# Altium PCB sensor.PcbDoc
Units mil, origin at the board's own origin, x right, y up, seen from the top; angles counter-clockwise.
Board outline 2500 x 2200 mil, 2 copper layers (Top Layer, Bottom Layer); 22 components, 20 nets, 80 pads, 0 vias.
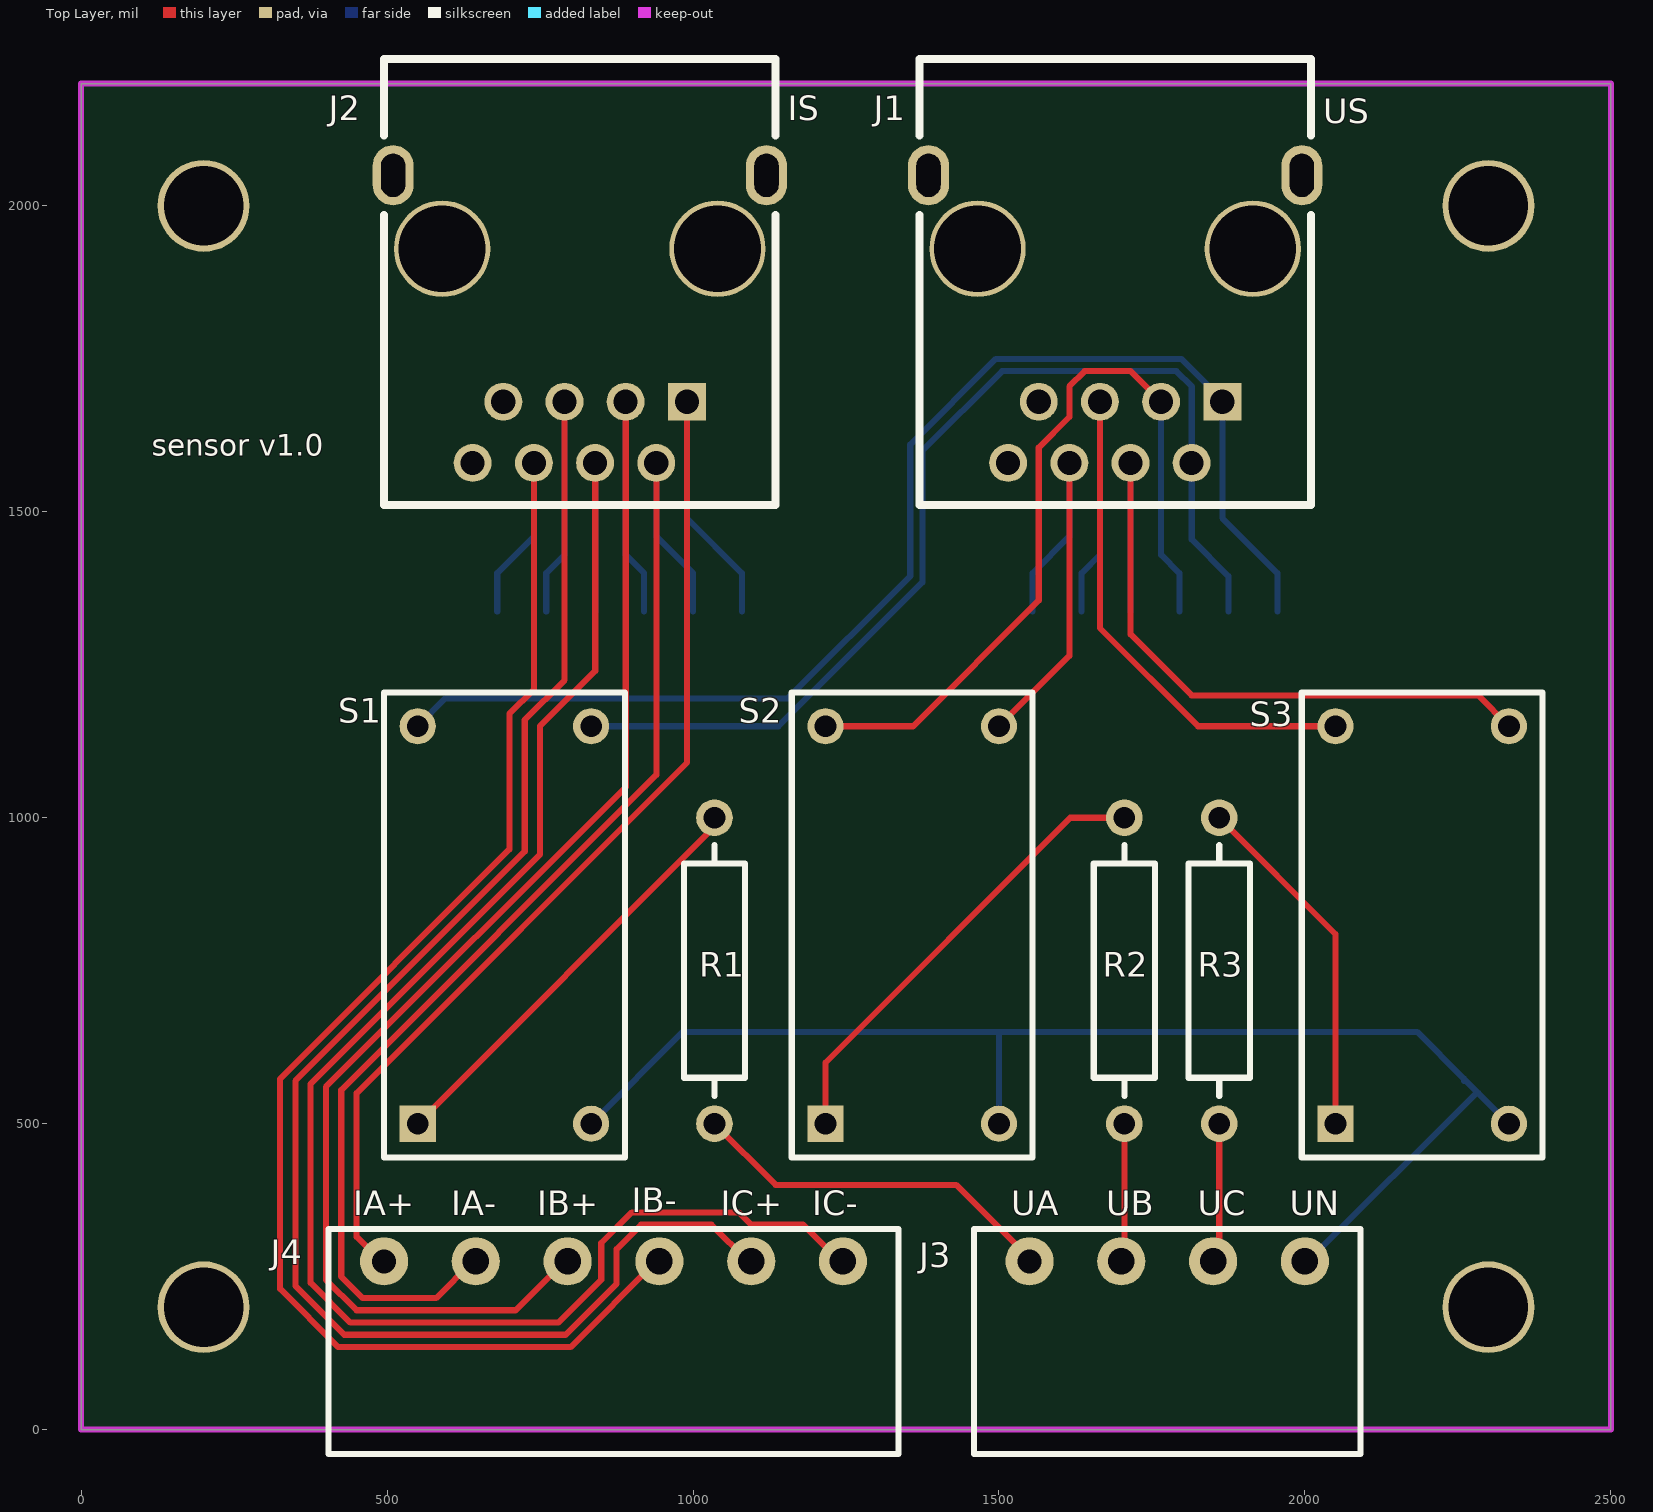
[diagram p0: Top Layer view]
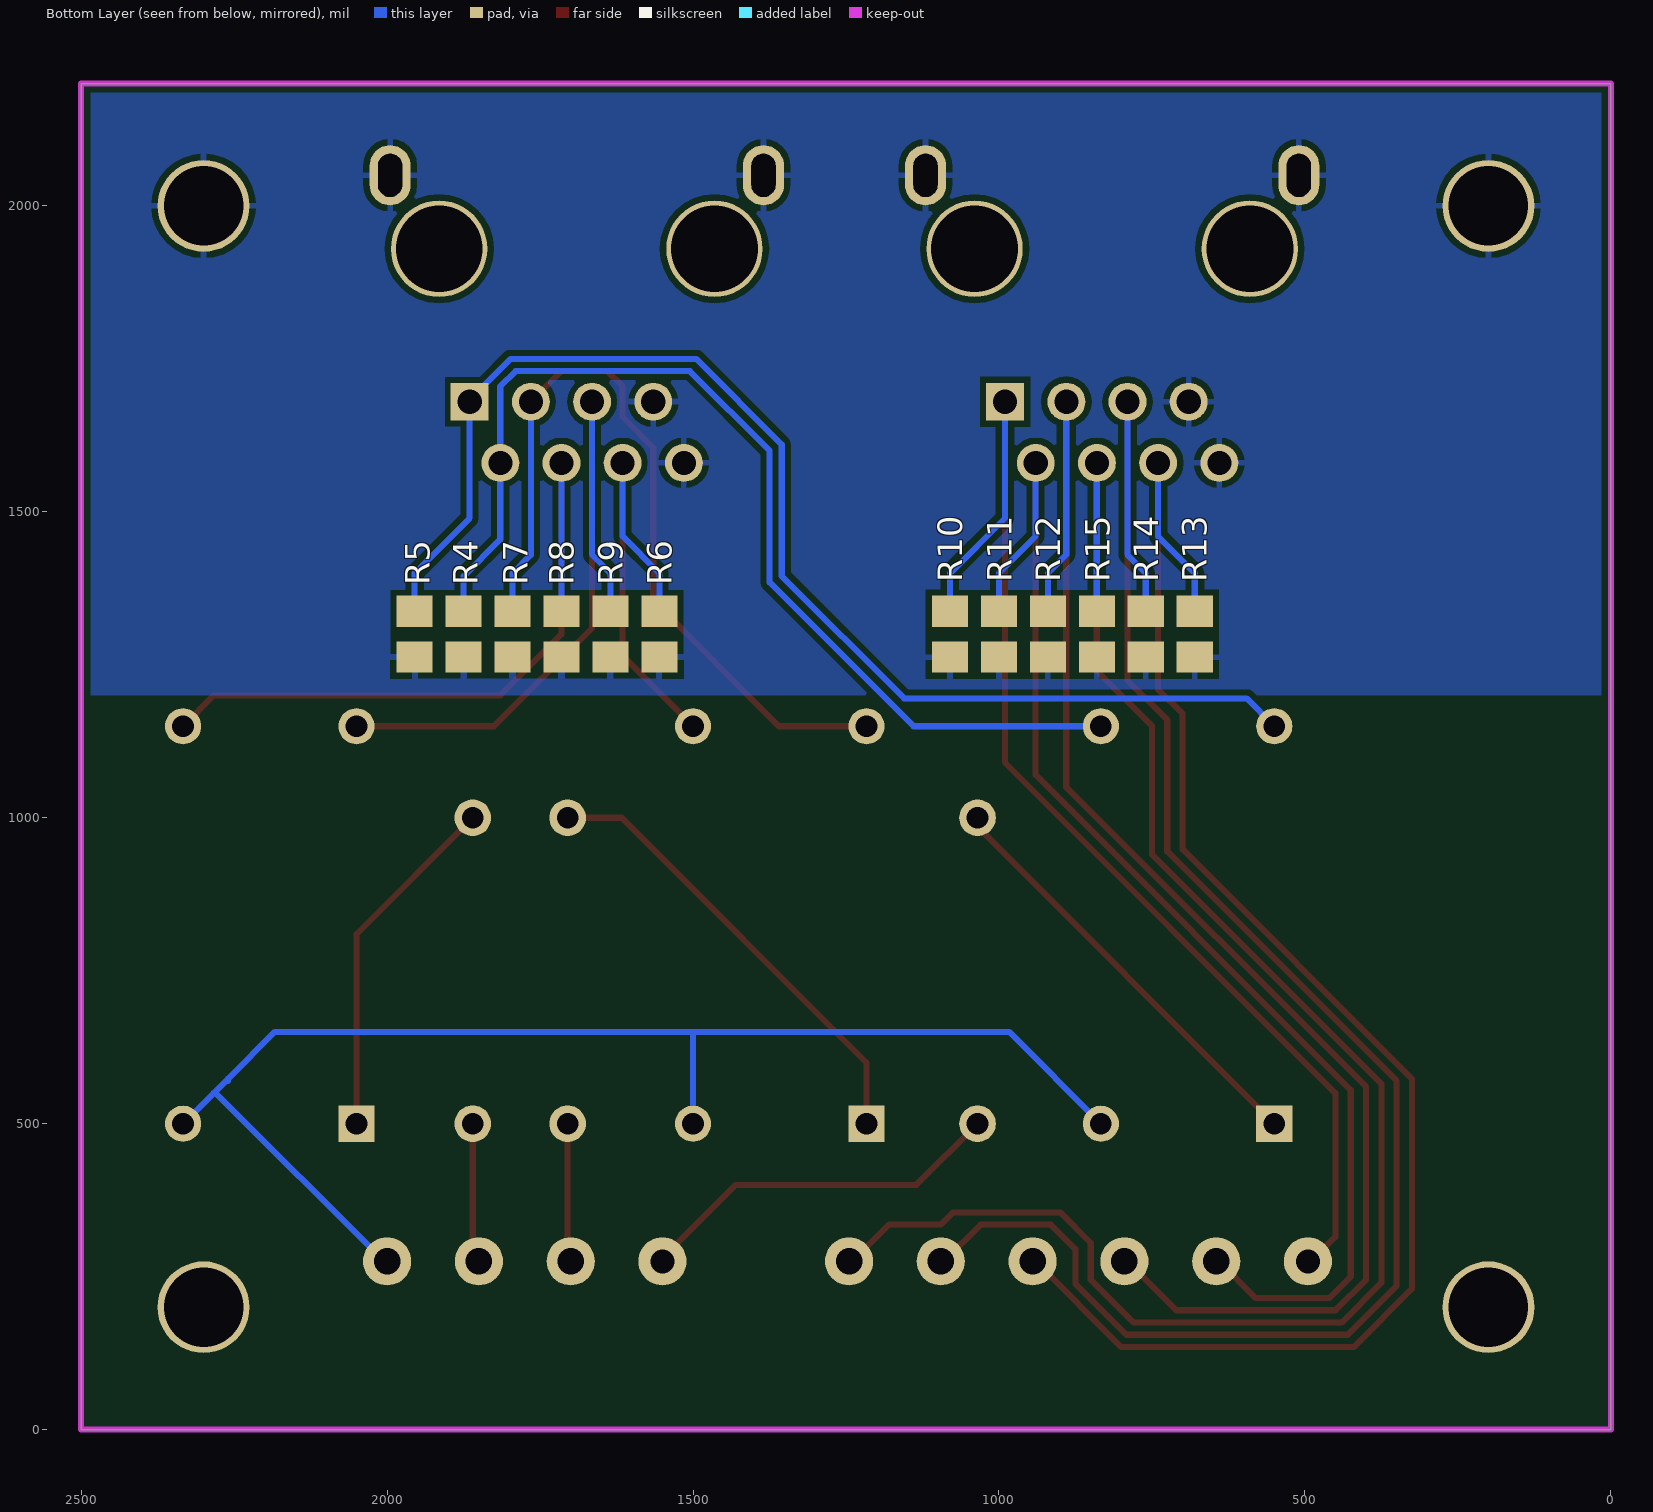
[diagram p1: Bottom Layer view, seen from below]

## Layer stack, top to bottom
Top Solder: solder mask 0.4, Solder Resist, Dk 3.5
Top Layer: signal copper 1.4
Dielectric 1: dielectric 12.6, FR-4, Dk 4.8
Bottom Layer: signal copper 1.4
Bottom Solder: solder mask 0.4, Solder Resist, Dk 3.5

## Board outline
0,0 0,2200 2500,2200 2500,0

## Design rules (kind name [scope] priority, off if disabled: settings)
Clearance [All] p1: gap=10 ignorepadtopadclearanceinfootprint=FALSE except(0: Arc-Hole Track-Hole SMDPad-Hole THPad-Hole Via-Hole Fill-Hole Poly-Hole Region-Hole Text-Hole; 8: Arc-Text Track-Text Text-Text)
HoleSize [All] p1: absolutevalues=TRUE maxlimit=150 minlimit=1 maxpercent=80.000 minpercent=20.000
MinimumSolderMaskSliver [All] p1: minsoldermaskwidth=8
PolygonConnect [All] p1: connectstyle=Relief reliefconductorwidth=10 reliefentries=4 polygonreliefangle="90 Angle" airgapwidth=10
RoutingVias [All] p1: holewidth=28 width=50 viastyle="Through Hole" minholewidth=28 minwidth=50 maxholewidth=150 maxwidth=200
SilkToSilkClearance [All] p1: silktosilkclearance=8
SilkToSolderMaskClearance [IsPad] p1: minsilkscreentomaskgap=8 clearancetoexposedcopper=TRUE
SolderMaskExpansion [All] p1: expansion=4
Width [All] p1: maxlimit=10 minlimit=10 preferedwidth=10
26 further rules are at their usual default settings.

## Components (designator, comment, footprint, x,y, rotation, side; value= is the part's Value field where it differs from the comment)
J1 "US" RJ-45 1690,1815 r90 top
J2 "IS" RJ-45 814.88,1815 r90 top
J3 "UIN" 2EDG-3.81-4P 1550,275 r0 top
J4 "IS" 2EDG-3.81-6P 495,275 r0 top
R1 "154" R1W 1035,1000 r270 top
R2 "154" R1W 1705,1000 r270 top
R3 "154" R1W 1860,1000 r270 top
R4 "510" 0805 1875,1300 r90 bottom
R5 "510" 0805 1955,1300 r270 bottom
R6 "510" 0805 1555,1300 r90 bottom
R7 "510" 0805 1795,1300 r270 bottom
R8 "510" 0805 1715,1300 r90 bottom
R9 "510" 0805 1635,1300 r270 bottom
R10 "5R1" 0805 1080,1300 r90 bottom
R11 "5R1" 0805 1000,1300 r90 bottom
R12 "5R1" 0805 920,1300 r90 bottom
R13 "5R1" 0805 680,1300 r90 bottom
R14 "5R1" 0805 760,1300 r90 bottom
R15 "5R1" 0805 840,1300 r90 bottom
S1 "US" US 550,500 r90 top
S2 "US" US 1216.54,500 r90 top
S3 "US" US 2050,500 r90 top

## Footprints (in the part's own frame and the unit in brackets; to place one, negate y for a bottom-side part, rotate by r counter-clockwise, add the part's x,y. Pads: shape width x height; smd on the part's side, far side on the other; paste and mask are expansions set on the pad)
2EDG-3.81-4P [mm]
  round 2 hole 1: 1(0,0)
  round 2 hole 1.1: 2(3.81,0) 3(7.62,0) 4(11.43,0)
  silkscreen extent -2.3,-8 13.73,1.35
2EDG-3.81-6P [mm]
  round 2 hole 1: 1(0,0)
  round 2 hole 1.1: 2(3.81,0) 3(7.62,0) 4(11.43,0) 5(15.24,0) 6(19.05,0)
  silkscreen extent -2.3,-8 21.35,1.35
0805 [mm]
  rect 1.3x1.5 smd: 1(-0.95,0) 2(0.95,0)
R1W [mil]
  round 60 hole 35.43: 1(0,0) 2(500,0)
  silkscreen extent 45,-50 455,50
RJ-45 [mm]
  rect 1.575x1.575 hole 1: 1(-3.43,-4.445)
  round 1.575 hole 1: 2(-5.97,-3.175) 3(-3.43,-1.905) 4(-5.97,-0.635) 5(-3.43,0.635) 6(-5.97,1.905) 7(-3.43,3.175) 8(-5.97,4.445)
  oval 2.5x1.7 hole 1 slot 1.8 at 0 deg: 9(5.97,-7.75) 10(5.97,7.75)
  round 4 hole 3.6: ""(2.92,5.715) ""(2.92,-5.715)
  silkscreen extent -7.71,-8.13 10.79,8.13
US [mm]
  rect 1.5x1.5 hole 0.9: 1(0,0)
  round 1.5 hole 0.9: 2(0,-7.2) 3(16.5,-7.2) 4(16.5,0)
  silkscreen extent -1.4,-8.6 17.9,1.4

## Part data
J1 J2: library part RJ45, "RJ45水晶座"
J3: library part MHDR1X4, "Header, 4-Pin", LatestRevisionDate=17-Jul-2002, LatestRevisionNote="Re-released for DXP Platform.", Publisher="Altium Limited"
J4: library part MHDR1X6, "Header, 6-Pin", LatestRevisionDate=17-Jul-2002, LatestRevisionNote="Re-released for DXP Platform.", Publisher="Altium Limited"
R1 R2 R3: library part Res, "电阻", LatestRevisionDate=17-Jul-2002, LatestRevisionNote="Re-released for DXP Platform.", Published=8-Jun-2000, Publisher="Altium Limited"
R4 R5 R6 R7 R8 R9 R10 R11 R12 R13 R14 R15: library part Res, "Resistor", LatestRevisionDate=17-Jul-2002, LatestRevisionNote="Re-released for DXP Platform.", Published=8-Jun-2000, Publisher="Altium Limited"
S1 S2 S3: "电压互感器"

## Free pads (board coordinates)
  round 150 hole 130: ""(200,200) ""(200,2000) ""(2300,200) ""(2300,2000)

## Nets (pads, with @x,y where several pads share a name; then routed paths per layer and width w, separated by ;. In a path a pad name is that pad's centre, name@x,y a point inside that pad or via, vN(x,y) a via of type N, cw(c..) or ccw(c..) an arc to the next point about the centre after c; other vN are vias at no path point)
GND: J1.7 J1.8 J1.9 J1.10 J2.7 J2.8 J2.9 J2.10 pad.@200,2000 pad.@2300,2000 R4.1 R5.2 R6.1 R7.2 R8.1 R9.2 R10.1 R11.1 R12.1 R13.1 R14.1 R15.1
NetJ1_1: J1.1 R5.1 S1.4 | length 2100.4
  Bottom Layer w10: S1.4 595.39,1195 1155,1195 1355,1395 1355,1610 1495,1750 1798.28,1750 1865.12,1683.17 1865.12,1679.92 1865.12,1489.88 1955,1400 R5.1
NetJ1_2: J1.2 R4.2 S1.3 | length 1750.7
  Bottom Layer w10: S1.3 1139.61,1149.61 1375,1385 1375,1600 1505,1730 1790,1730 1815.12,1704.88 1815.12,1579.92 1815.12,1454.88 1875,1395 R4.2
NetJ1_3: J1.3 R7.1 S2.4 | length 1340.3
  Top Layer w10: S2.4 1359.61,1149.61 1565.12,1355.12 1565.12,1605.12 1615,1655 1615,1704.88 1640.12,1730 1715.04,1730 J1.3@1765.12,1679.92
  Bottom Layer w10: J1.3@1765.12,1679.92 1765.12,1429.88 1795,1400 R7.1
NetJ1_4: J1.4 R8.2 S3.3 | length 1203.2
  Top Layer w10: J1.4@1715.12,1579.92 1715.12,1299.88 1815,1200 2283.07,1200 S3.3
  Bottom Layer w10: R8.2 1715.12,1337.52 J1.4@1715.12,1579.92
NetJ1_5: J1.5 R9.1 S3.4 | length 1176.3
  Top Layer w10: J1.5@1665.12,1679.92 1665.12,1309.88 1825.39,1149.61 S3.4
  Bottom Layer w10: R9.1 1635,1400 1665.12,1430.12 J1.5@1665.12,1679.92
NetJ1_6: J1.6 R6.2 S2.3 | length 745.4
  Top Layer w10: S2.3 1615.12,1264.72 J1.6@1615.12,1579.92
  Bottom Layer w10: R6.2 1555,1400 1615.12,1460.12 J1.6@1615.12,1579.92
NetJ2_1: J2.1 J4.1 R10.2 | length 2025
  Top Layer w10: J4.1@490,275 450,315 450,550 990.12,1090.12 J2.1@990.12,1679.92
  Bottom Layer w10: J2.1@990.12,1679.92 990.12,1489.88 1080,1400 R10.2
NetJ2_2: J2.2 J4.2 R11.2 | length 2065
  Top Layer w10: J4.2@640,275 580,215 460,215 425,250 425,555 940.12,1070.12 J2.2@940.12,1579.92
  Bottom Layer w10: J2.2@940.12,1579.92 940.12,1459.88 1000,1400 R11.2
NetJ2_3: J2.3 J4.3 R12.2 | length 2436.7
  Top Layer w10: J4.3@790,275 710,195 450,195 400,245 400,560 890.12,1050.12 J2.3@890.12,1679.92
  Bottom Layer w10: J2.3@890.12,1679.92 890.12,1429.88 920,1400 R12.2
NetJ2_4: J2.4 J4.6 R15.2 | length 2809.9
  Top Layer w10: J2.4@840.12,1579.92 840.12,1240.12 750,1150 750,940 375,565 375,240 440,175 780,175 850,245 850,305 900,355 1075,355 1095,335 1180,335 J4.6@1240,275
  Bottom Layer w10: R15.2 840.12,1337.52 J2.4@840.12,1579.92
NetJ2_5: J2.5 J4.5 R14.2 | length 2887.9
  Top Layer w10: J2.5@790.12,1679.92 790.12,1225.12 725,1160 725,945 350,570 350,235 430,155 791.72,155 875,238.28 875,294.88 915.12,335 1030,335 J4.5@1090,275
  Bottom Layer w10: R14.2 760,1400 790.12,1430.12 J2.5@790.12,1679.92
NetJ2_6: J2.6 J4.4 R13.2 | length 2501.6
  Top Layer w10: J2.6@740.12,1579.92 740.12,1210.12 700,1170 700,948.28 325,573.28 325,230 420,135 800,135 J4.4@940,275
  Bottom Layer w10: R13.2 680,1400 740.12,1460.12 J2.6@740.12,1579.92
NetJ3_1: J3.1 R1.2 | length 613.2
  Top Layer w10: R1.2 1135,400 1430,400 J3.1@1555,275
NetJ3_2: J3.2 R2.2 | length 225
  Top Layer w10: J3.2@1705,275 R2.2
NetJ3_3: J3.3 R3.2 | length 227.1
  Top Layer w10: J3.3@1855,275 1860,280 R3.2
NetJ3_4: J3.4 S1.2 S2.2 S3.2 | length 2170.1
  Bottom Layer w10: S1.2 983.46,650 1500,650 ; S2.2 1500,650 ; J3.4@2005,275 2280,550 2283.46,550 ; 2260,570 2260,573.46 ; S3.2 2283.46,550 ; 1500,650 2183.46,650 2260,573.46 ; 2260,573.46 2283.46,550
NetR1_1: R1.1 S1.1 | length 715.9
  Top Layer w10: S1.1@550,515 S1.1 1035,985 R1.1
NetR2_1: R2.1 S2.1 | length 754.2
  Top Layer w10: S2.1 1216.54,600 1616.54,1000 R2.1
NetR3_1: R3.1 S3.1 | length 578.7
  Top Layer w10: R3.1 2050,810 S3.1
pads on no net: J1. J2.

## Polygon pours and split planes (outlines as drawn)
GND on Bottom Layer "Bottom Layer-GND" (solid, pour order 0): 0,2200 2500,2200 2500,1200 0,1200

## Keep-outs
Keep-Out Layer:
  the board outline again, w10

## Silkscreen, mask and mechanical layers (free items; w line width, h text height)
Top Overlay:
  text "sensor v1.0" at 115,1579.92 h60
  text "IB-" at 900,355 h40
  text "IA+" at 445,350 h40
  text "IA-" at 605,350 h40
  text "IB+" at 745,350 h40
  text "IC+" at 1045,350 h40
  text "IC-" at 1195,350 h40
  text "UA" at 1520,350 h40
  text "UB" at 1675,350 h40
  text "UC" at 1825,350 h40
  text "UN" at 1975,350 h40